# Altium PCB PCB1.PcbDoc
Units mil, origin at the board's own origin, x right, y up, seen from the top; angles counter-clockwise.
Board outline 1824.54 x 1676.03 mil, 2 copper layers (Top Layer, Bottom Layer); 19 components, 12 nets, 47 pads, 1 vias.
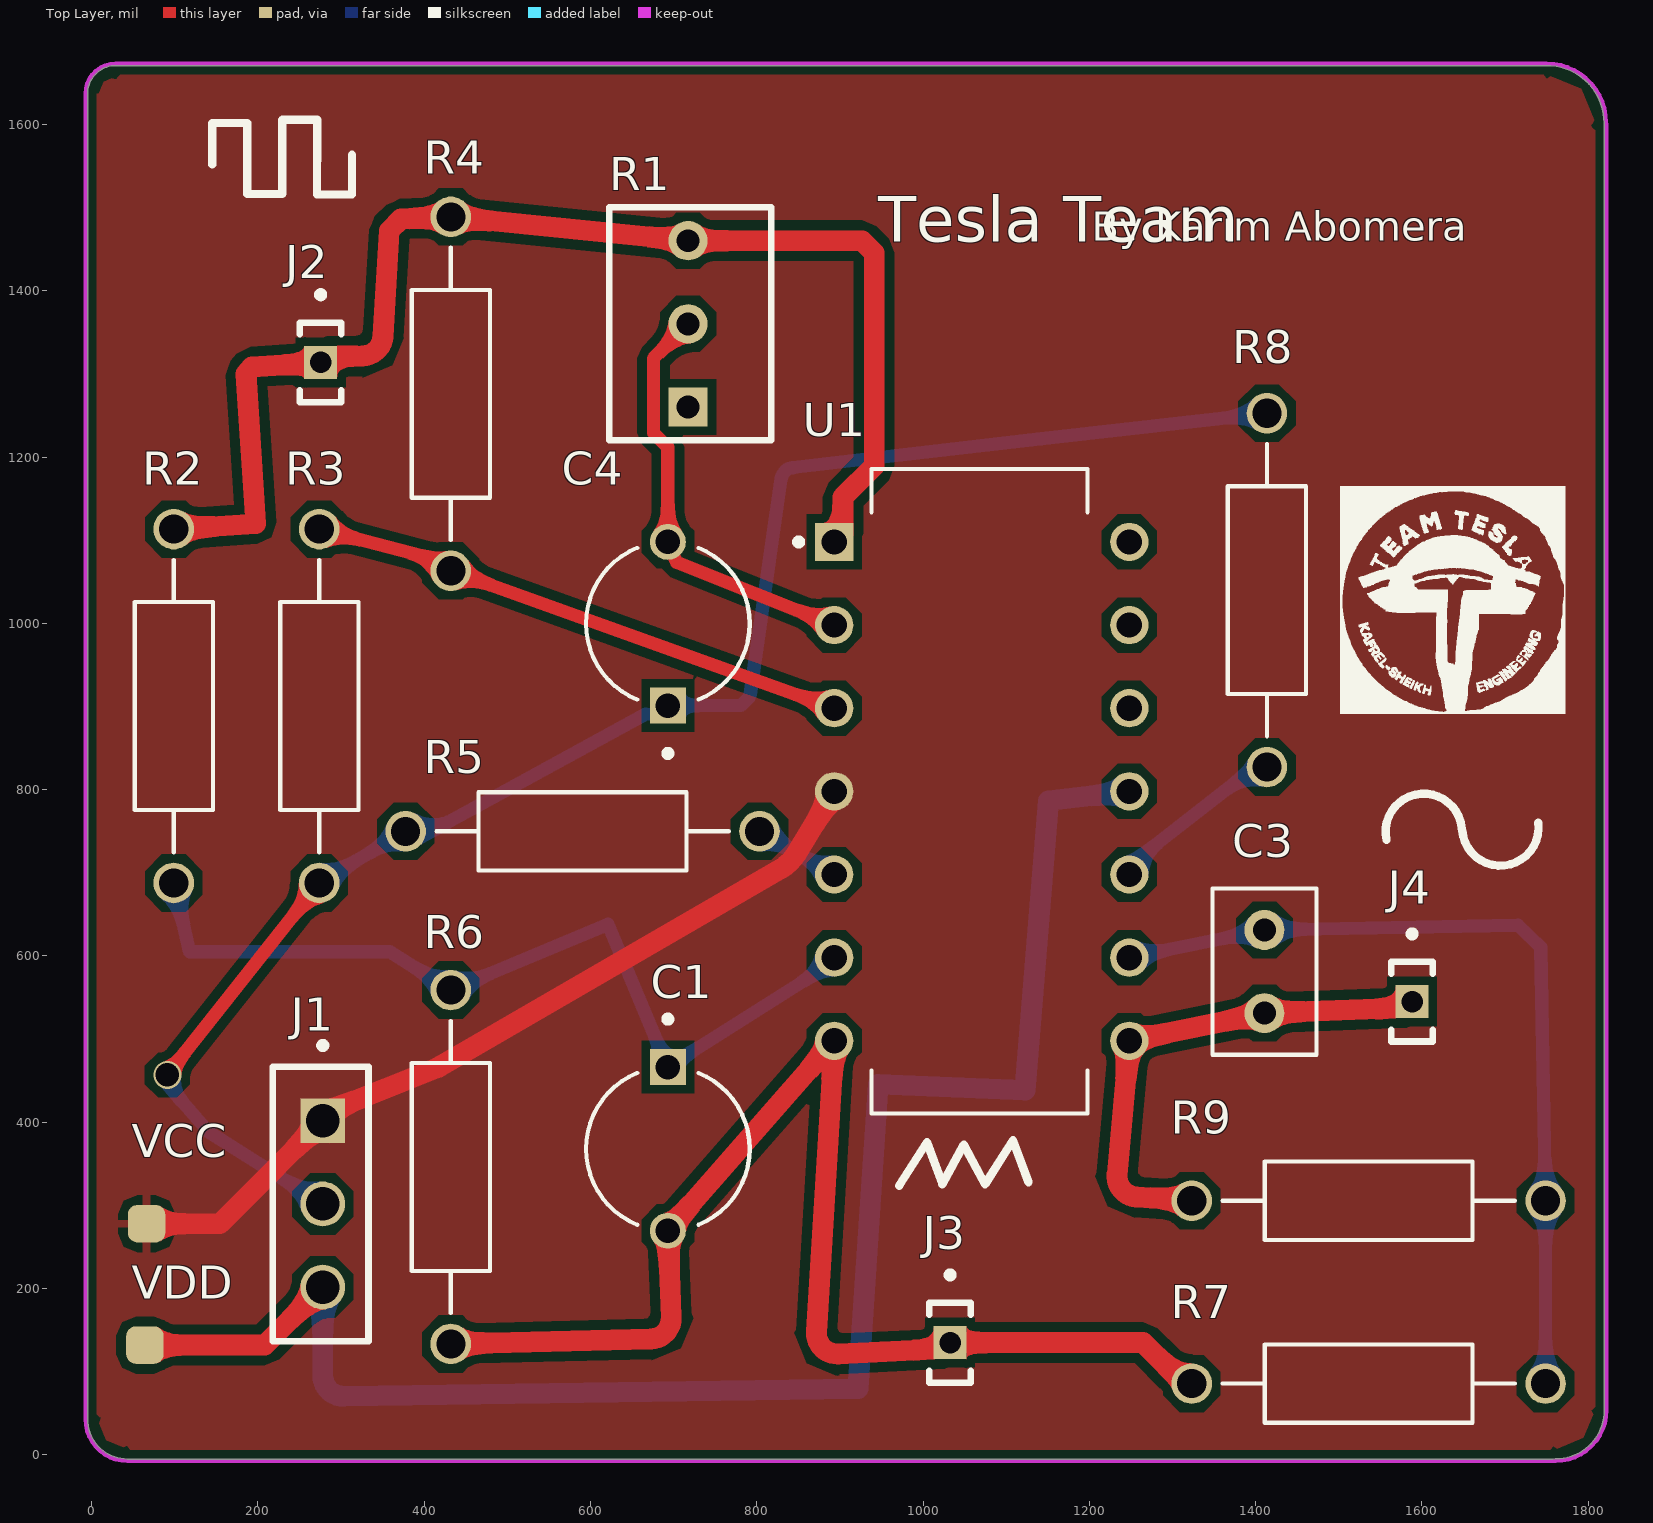
[diagram p0: Top Layer view]
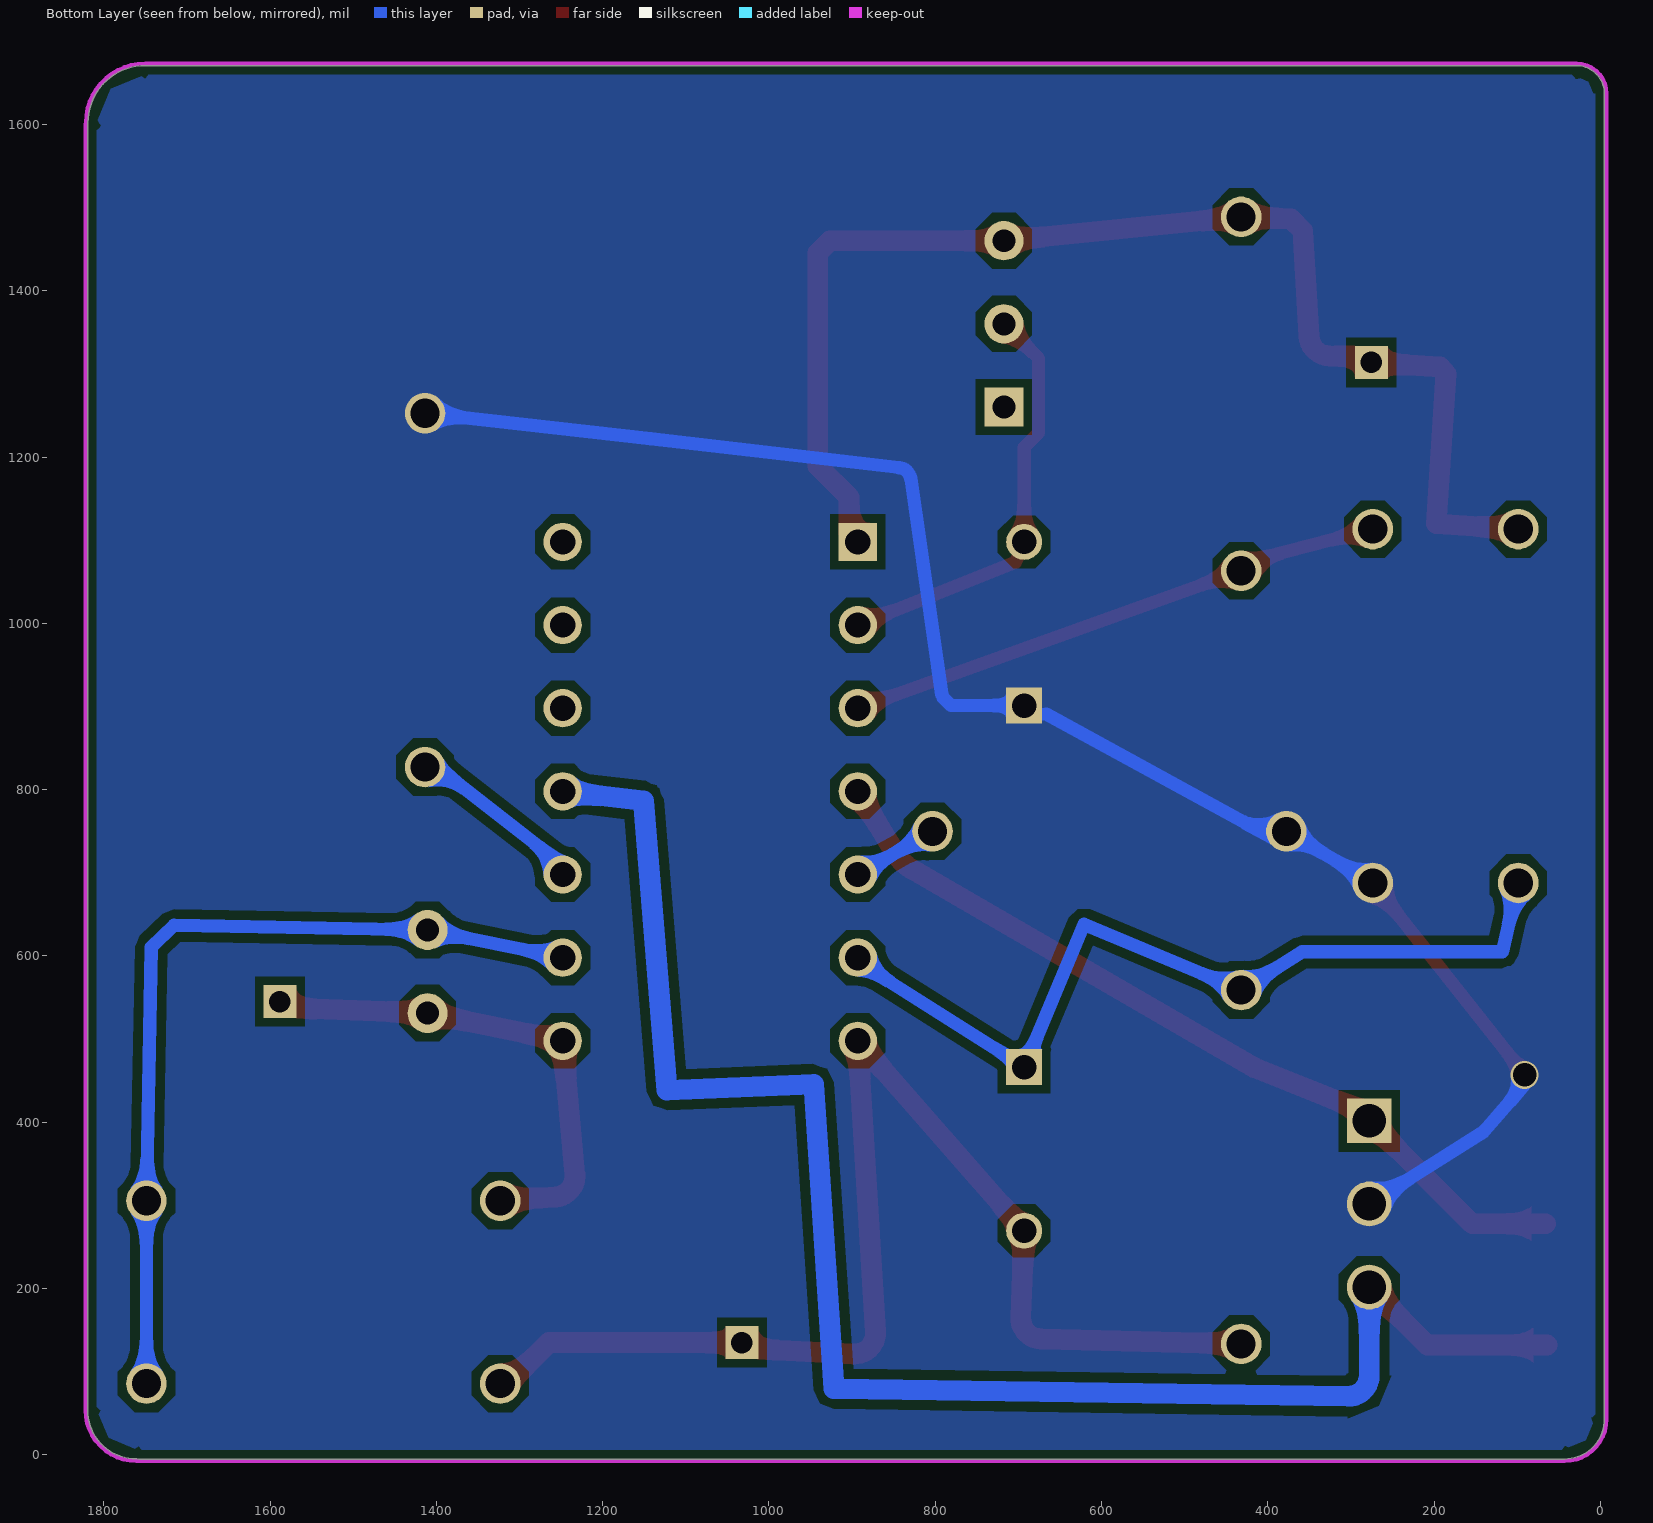
[diagram p1: Bottom Layer view, seen from below]
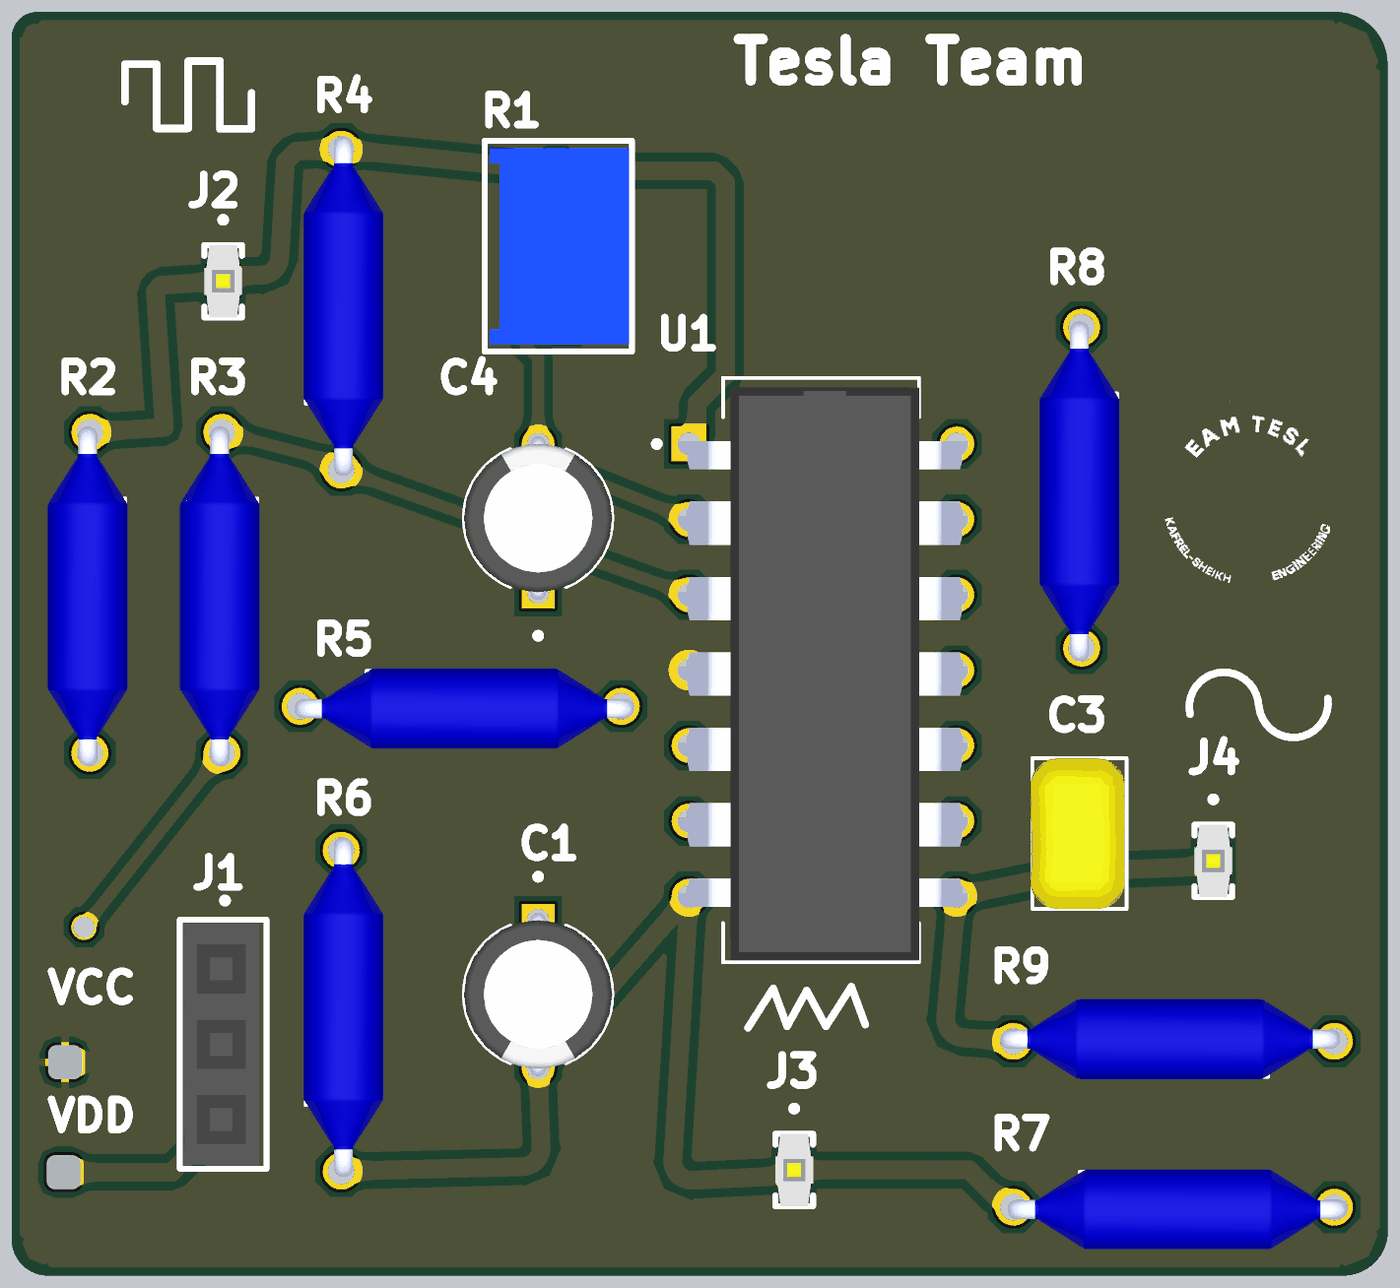
[diagram p2: 3D render of the assembled board from above, using the file's embedded part models]

## Layer stack, top to bottom
Top Solder: solder mask 0.4, Solder Resist, Dk 3.5
Top Layer: signal copper 1.4
Dielectric 1: dielectric 12.6, FR-4, Dk 4.8
Bottom Layer: signal copper 1.4
Bottom Solder: solder mask 0.4, Solder Resist, Dk 3.5

## Board outline
43,-5.02 cw(c43,42.98) -5,42.98 -5.02,45 -5.02,1637 cw(c28.98,1637) 28.98,1671 29,1671.02 1750,1671.02 cw(c1750,1602.02) 1819,1602.02 1819.52,1600 1819.52,54 cw(c1760.52,54) 1760.52,-5 1758,-5.02

## Design rules (kind name [scope] priority, off if disabled: settings)
Clearance [All] p1: gap=10 ignorepadtopadclearanceinfootprint=FALSE except(20: Arc-Arc Arc-Track Track-Track)
PolygonConnect [All] p1: thpad.connectstyle=Direct thpad.reliefconductorwidth=10 thpad.reliefentries=4 thpad.polygonreliefangle="90 Angle" thpad.airgapwidth=10 smdpad.connectstyle=Relief smdpad.reliefconductorwidth=10 smdpad.reliefentries=4 smdpad.polygonreliefangle="90 Angle" smdpad.airgapwidth=10 via.connectstyle=Direct via.reliefconductorwidth=10 via.reliefentries=4 via.polygonreliefangle="90 Angle" via.airgapwidth=10
RoutingVias [All] p1: holewidth=24 width=33.8 viastyle="Through Hole" minholewidth=24 minwidth=33.8 maxholewidth=31.5 maxwidth=33.8
SilkToSilkClearance [All] p1: silktosilkclearance=1
SolderMaskExpansion [All] p1: expansion=4 istentingtop=FALSE
SupplyNets "Schematic Supply Nets_2" [InNet('VCC')] p1: voltage=0.000
SupplyNets "Schematic Supply Nets_1" [InNet('VDD')] p2: voltage=0.000
SupplyNets "Schematic Supply Nets" [InNet('GND')] p3: voltage=0.000
Width [All] p1: maxlimit=25 minlimit=16 preferedwidth=16 minimp=50.000000 maximp=50.000000 favimp=50.000000
29 further rules are at their usual default settings.

## Components (designator, comment, footprint, x,y, rotation, side; value= is the part's Value field where it differs from the comment)
C1 "EEUHD1H1R0B" CAPPRD500W50D500H1100 693,368 r270 top value=1µF
C3 "SR291C104KARTR1" CAPRR254W50L508T317H508 1410.56,581.27 r270 top value=100nF
C4 "EEUHD1H1R0B" CAPPRD500W50D500H1100 693,999.64 r90 top value=1µF
J1 "TSW-103-19-S-S" SAMTEC_TSW-103-19-S-S 277.91,401.8 r270 top value="female  Header 3"
J2 "TMS-101-60-S-S" SAMTEC_TMS-101-60-S-S 275.41,1313.9 r0 top value="header 1"
J3 "TMS-101-60-S-S" SAMTEC_TMS-101-60-S-S 1032.47,134.97 r0 top value="header 1"
J4 "TMS-101-60-S-S" SAMTEC_TMS-101-60-S-S 1588.13,545.13 r0 top value="header 1"
R1 "3362 trimpot" "33262M TRIMPOT" 717.3,1360.3 r90 top value=50K
R2 "RNC55H1003FMB14" RESAD1081W64L635D269 98.74,900.61 r270 top value=10K
R3 "RNC55H1003FMB14" RESAD1081W64L635D269 273.74,900.61 r270 top value=22K
R4 "RNC55H1003FMB14" RESAD1081W64L635D269 431.94,1276.19 r90 top value=100K
R5 "RNC55H1003FMB14" RESAD1081W64L635D269 590.39,749.94 r0 top value=10K
R6 "RNC55H1003FMB14" RESAD1081W64L635D269 431.94,346.19 r90 top value=100K
R7 "RNC55H1003FMB14" RESAD1081W64L635D269 1535.85,85.65 r0 top value=100K
R8 "RNC55H1003FMB14" RESAD1081W64L635D269 1413.51,1039.99 r270 top value=100K
R9 "RNC55H1003FMB14" RESAD1081W64L635D269 1535.85,305.65 r180 top value=220K
U1 "LM324N" DIP794W45P254L1969H508Q14 1068,798 r0 top
VCC "TEST POINT" "TEST POINT" 61,233 r0 top
VDD "TEST POINT" "TEST POINT" 59,87 r0 top

## Footprints (in the part's own frame and the unit in brackets; to place one, negate y for a bottom-side part, rotate by r counter-clockwise, add the part's x,y. Pads: shape width x height; smd on the part's side, far side on the other; paste and mask are expansions set on the pad)
"33262M TRIMPOT" [mm] "Thru-Hole; 3 Leads"
  rect 1.2x1.2 hole 0.7: 1(-2.54,0)
  round 1.2 hole 0.7: 2(0,0) 3(2.54,0)
  silkscreen extent -3.56,-2.54 3.56,2.41, body extent -3.3,-2.45 3.3,2.25, height 8.3
CAPPRD500W50D500H1100 [mm]
  round 1.1 hole 0.75: N(2.5,0)
  rect 1.1x1.1 hole 0.75: P(-2.5,0)
  silkscreen extent -4.06,-2.5 2.32,2.5, body extent -2.75,-2.5 2.75,2.5, height 12.52
CAPRR254W50L508T317H508 [mm]
  round 1.218 hole 0.71: 1(-1.27,0) 2(1.27,0)
  silkscreen extent -2.54,-1.59 2.54,1.59, body extent -2.54,-1.65 2.54,1.53, height 6.85
DIP794W45P254L1969H508Q14 [mm]
  rect 1.17x1.17 hole 0.77: 1(-4.445,7.62)
  round 1.17 hole 0.77: 2(-4.445,5.08) 3(-4.445,2.54) 4(-4.445,0) 5(-4.445,-2.54) 6(-4.445,-5.08) 7(-4.445,-7.62) 8(4.572,-7.62) 9(4.572,-5.08) 10(4.572,-2.54) 11(4.572,0) 12(4.572,2.54) 13(4.572,5.08) 14(4.572,7.62)
  silkscreen extent -5.63,-9.84 3.3,9.84, body extent -5.33,-9.78 5.59,9.53, height 5.08
RESAD1081W64L635D269 [mm]
  round 1.24 hole 0.89: 1(-5.405,0) 2(5.405,0)
  silkscreen extent -4.46,-1.19 4.46,1.19, body extent -5.6,-1.42 5.85,1.27, height 3.44
SAMTEC_TMS-101-60-S-S [mm]
  rect 1.01x1.01 hole 0.66: 01(0,0)
  silkscreen extent -0.64,-1.22 0.64,2.17, body extent -0.64,-1.22 0.64,1.22, height 17.91
SAMTEC_TSW-103-19-S-S [mm]
  rect 1.37x1.37 hole 1.02: 01(0,0)
  round 1.37 hole 1.02: 02(2.54,0) 03(5.08,0)
  silkscreen extent -2.4,-1.52 6.73,1.4, body extent -1.52,-1.4 6.6,1.14, height 8.51
"TEST POINT" [mil]
  rrect50% 45x45 smd: 1(5,45)

## Part data
C1 C4: "Cap Aluminum Lytic 1uF 50V 20% (5 X 11mm) Radial 5mm 10mA 1000h 105Â°C Automotive Ammo", Package="RADIAL-2 Panasonic", Availability="In Stock", Check_prices=https://www.snapeda.com/parts/EEUHD1H1R0B/Panasonic/view-part/5786221/?ref=eda, MF=Panasonic, MP=EEUHD1H1R0B, Price=None, SnapEDA_Link=https://www.snapeda.com/parts/EEUHD1H1R0B/Panasonic/view-part/5786221/?ref=snap
C3: "Capacitor, Ceramic, 100nF, 100VDC, 10-% Tol, 10+% Tol, X7R-TC Code, -15, 15%-TC", Package="Radial AVX", Check_prices=https://www.snapeda.com/parts/SR291C104KARTR1/AVX/view-part/?ref=eda, MF=AVX, MP=SR291C104KARTR1, SnapEDA_Link=https://www.snapeda.com/parts/SR291C104KARTR1/AVX/view-part/?ref=snap
J1 J2 J3 J4: Package=None, Availability=Unavailable, Price=None
  J1: MP=TSW-103-19-S-S
  J2 J3 J4: MP=TMS-101-60-S-S
R1: "3362M Timpot", LatestRevisionDate=17-Jul-2002, LatestRevisionNote="Re-released for DXP Platform.", PackageDescription="Variable Resistor, Thru-Hole; 3 Leads", PackageReference=VR5, Published=8-Jun-2000, Publisher="Altium Limited", Set Position=0.5, Sim Note="Enter the Resistance value and the set point into parameter fields."
R2 R3 R4 R5 R6 R7 R8 R9: "RES 100K OHM 1/8W 1% AXIAL", Package=None, Availability="In Stock", Check_prices=https://www.snapeda.com/parts/RNC55H1003FMB14/Vishay+Dale/view-part/?ref=eda, MF="Vishay Dale", MP=RNC55H1003FMB14, Price=None, Purchase-URL=https://pricing.snapeda.com/search/part/RNC55H1003FMB14/?ref=eda, SnapEDA_Link=https://www.snapeda.com/parts/RNC55H1003FMB14/Vishay+Dale/view-part/?ref=snap
U1: "General Purpose Amplifier 4 Circuit - 14-MDIP", Package="DIP-14 Motorola", Availability="In Stock", Check_prices=https://www.snapeda.com/parts/LM324N/Onsemi/view-part/?ref=eda, MF="ON Semiconductor", MP=LM324N, Price=None, Purchase-URL=https://pricing.snapeda.com/search/part/LM324N/?ref=eda, SnapEDA_Link=https://www.snapeda.com/parts/LM324N/Onsemi/view-part/?ref=snap

## Via types
v1: diameter 33.8, hole 28, Top Layer to Bottom Layer, 1 vias

## Nets (pads, with @x,y where several pads share a name; then routed paths per layer and width w, separated by ;. In a path a pad name is that pad's centre, name@x,y a point inside that pad or via, vN(x,y) a via of type N, cw(c..) or ccw(c..) an arc to the next point about the centre after c; other vN are vias at no path point)
GND: C4.P J1.02 R3.2 R5.1 R8.1 | length 1985
  Top Layer w16: v1(91,457) R3.2
  Bottom Layer w16: v1(91,457) ccw(c106.32,452.38) v1@94.2,441.94 ; v1@94.23,441.9 139.45,389.79 ccw(c151.53,400.28) 142.98,386.75 J1.02 ; R3.2 R5.1 397.77,744.05 666.33,891.13 678.46,889.72 C4.P 776.31,901.22 780.81,901.22 790.18,910.59 792.15,914.95 829.25,1173.83 cw(c845.09,1171.52) 843.2,1187.41 ; 843.25,1187.42 1142.04,1222 R8.1
IN1: C4.N R1.2 U1.2 | length 517.2
  Top Layer w16: R1.2 675.68,1318.67 675.68,1229.22 693,1211.9 C4.N 703.44,1073.74 U1.2
IN2: C1.P R2.2 R6.2 U1.6 | length 1044.7
  Bottom Layer w16: R2.2 117.81,605 358.4,605 R6.2 621.1,638.18 C1.P 891.69,592.15 U1.6
IN3: C3.1 R7.2 R9.1 U1.9 | length 1034
  Bottom Layer w16: U1.9 C3.1 1715.47,637 1742.92,610.56 R9.1 R7.2
NetR3_1: R3.1 R4.1 U1.3 | length 659
  Top Layer w16: R3.1 425.9,1073.7 R4.1 U1.3
NetR5_2: R5.2 U1.5 | length 103.7
  Bottom Layer w16: R5.2 U1.5
NetR8_2: R8.2 U1.10 | length 217.2
  Bottom Layer w16: U1.10 1249.5,710.19 1401.32,828.7 R8.2
SIN: C3.2 J4.01 R9.2 U1.8 | length 614.4
  Top Layer w25: R9.2 1256.5,310.24 1256.43,310.25 cw(c1258.22,335.18) 1233.32,337.42 U1.8 C3.2 1580.74,537.75 J4.01
SQUARE: J2.01 R1.3 R2.1 R4.2 U1.1 | length 1555.6
  Top Layer w25: R2.1 197.39,1119.89 185.54,1300.09 192.9,1308.48 J2.01 282.8,1321.28 325.7,1321.75 ; 325.74,1321.75 ccw(c325.43,1346.75) 350.39,1345.26 357.96,1472.27 371.99,1486.31 420.33,1488.99 R4.2 R1.3 926.52,1460.3 941.16,1445.65 941.16,1189.48 903.53,1151.85 903.53,1108.53 U1.1
TRIANGLE: C1.N J3.01 R6.1 R7.1 U1.7 | length 1530
  Top Layer w25: R6.1 672.66,139.37 ccw(c672.04,164.36) 697.02,165.33 C1.N U1.7 871.69,147.79 ccw(c896.65,146.33) 897.83,121.36 1025.09,127.59 J3.01 1264.62,134.97 1302.03,97.56 1304.7,97.56 1316.61,85.65 R7.1
VCC: J1.01 U1.4 VCC.1 | length 1008
  Top Layer w25: VCC.1 154.12,278 292.38,416.26 416.34,465.93 416.39,465.96 ccw(c407.04,489.14) 419.58,467.51 829.24,705.04 ccw(c803.19,749.94) 847.59,723.04 U1.4
VDD: J1.03 U1.11 VDD.1 | length 1997.9
  Top Layer w25: VDD.1 208.12,132 J1.03
  Bottom Layer w25: J1.03 277.98,95.35 277.98,95.29 ccw(c302.98,95.37) 303.28,70.37 921.63,79.48 946.05,445.79 1122.54,438.59 1150.91,786.53 U1.11
pads on no net: R1.1 U1.12 U1.13 U1.14

## Polygon pours and split planes (outlines as drawn)
GND on Bottom Layer "GND_L01_P-001" (solid, remove dead copper, pour order 8): -3,1680 1815,1680 1815,-54 -7,-54
VCC on Top Layer "VCC_L01_P-001" (solid, remove dead copper, pour order 7): -26,1684 1827,1684 1827,-8 -5,-8

## Keep-outs
Keep-Out Layer:
  lines w5: -7.5,42.98 ccw(c43,42.98) -7.5,42.96 ; 1760.54,-7.5 1760.52,-7.5 ; -7.5,42.96 ccw(c43,42.98) 42.98,-7.52 ; -7.5,42.96 ccw(c43,42.98) -7.5,42.96 ; -7.5,42.96 ccw(c-5,42.98) -7.5,42.96 ; -7.5,42.96 -7.52,44.97 ; -7.5,42.96 -7.5,42.96 ; -7.52,44.97 cw(c-5.02,45) -7.52,45 ; -7.52,44.97 -7.52,44.98 ; -7.52,45 ccw(c-5.02,45) -7.52,44.98 ; -7.52,45 -7.52,1637 cw(c28.98,1637) 28.71,1673.5 ; 28.71,1673.5 cw(c29,1671.02) 29,1673.52 ; 28.71,1673.5 cw(c29,1671.02) 29,1673.52 ; 29,1673.52 1750,1673.52 ; 42.98,-7.52 ccw(c43,42.98) 43,-7.52 ; 42.98,-7.52 ccw(c43,-5.02) 43,-7.52 ; 43,-7.52 1758,-7.52 ; 1750.02,1673.52 ccw(c1750,1602.02) 1750,1673.52 ; 1750.02,1673.52 cw(c1750,1602.02) 1821.5,1602.34 1821.94,1600.62 ; 1750.02,1673.52 ccw(c1750,1671.02) 1750,1673.52 ; 1758,-7.52 ccw(c1758,-5.02) 1758.02,-7.52 ; 1758,-7.52 ccw(c1758,-5.02) 1758.03,-7.52 ; 1758.02,-7.52 1758.03,-7.52 ; 1758.03,-7.52 1760.52,-7.5 ; 1760.52,-7.5 ccw(c1760.52,54) 1822.02,53.98 ; 1821.94,1600.62 cw(c1819.52,1600) 1822.02,1600 ; 1821.94,1600.62 cw(c1819.52,1600) 1822.02,1600 ; 1822.02,53.98 ccw(c1819.52,54) 1822.02,54 ; 1822.02,53.98 ccw(c1760.52,54) 1822.02,54 ; 1822.02,54 1822.02,1600

## Silkscreen, mask and mechanical layers (free items; w line width, h text height)
Top Overlay:
  drawing of 49 lines, arcs and shapes, not listed
  text "By Karim Abomera" at 1203,1460 h35
  text "Tesla Team" at 946,1459.02 h55